# Altium PCB 功率主板.PcbDoc
Units mil, origin at the board's own origin, x right, y up, seen from the top; angles counter-clockwise.
Board outline 9524.95 x 5345.03 mil, 2 copper layers (Top Layer, Bottom Layer); 43 components, 30 nets, 130 pads, 0 vias.
Unrouted connection lines stored in the file: 16.
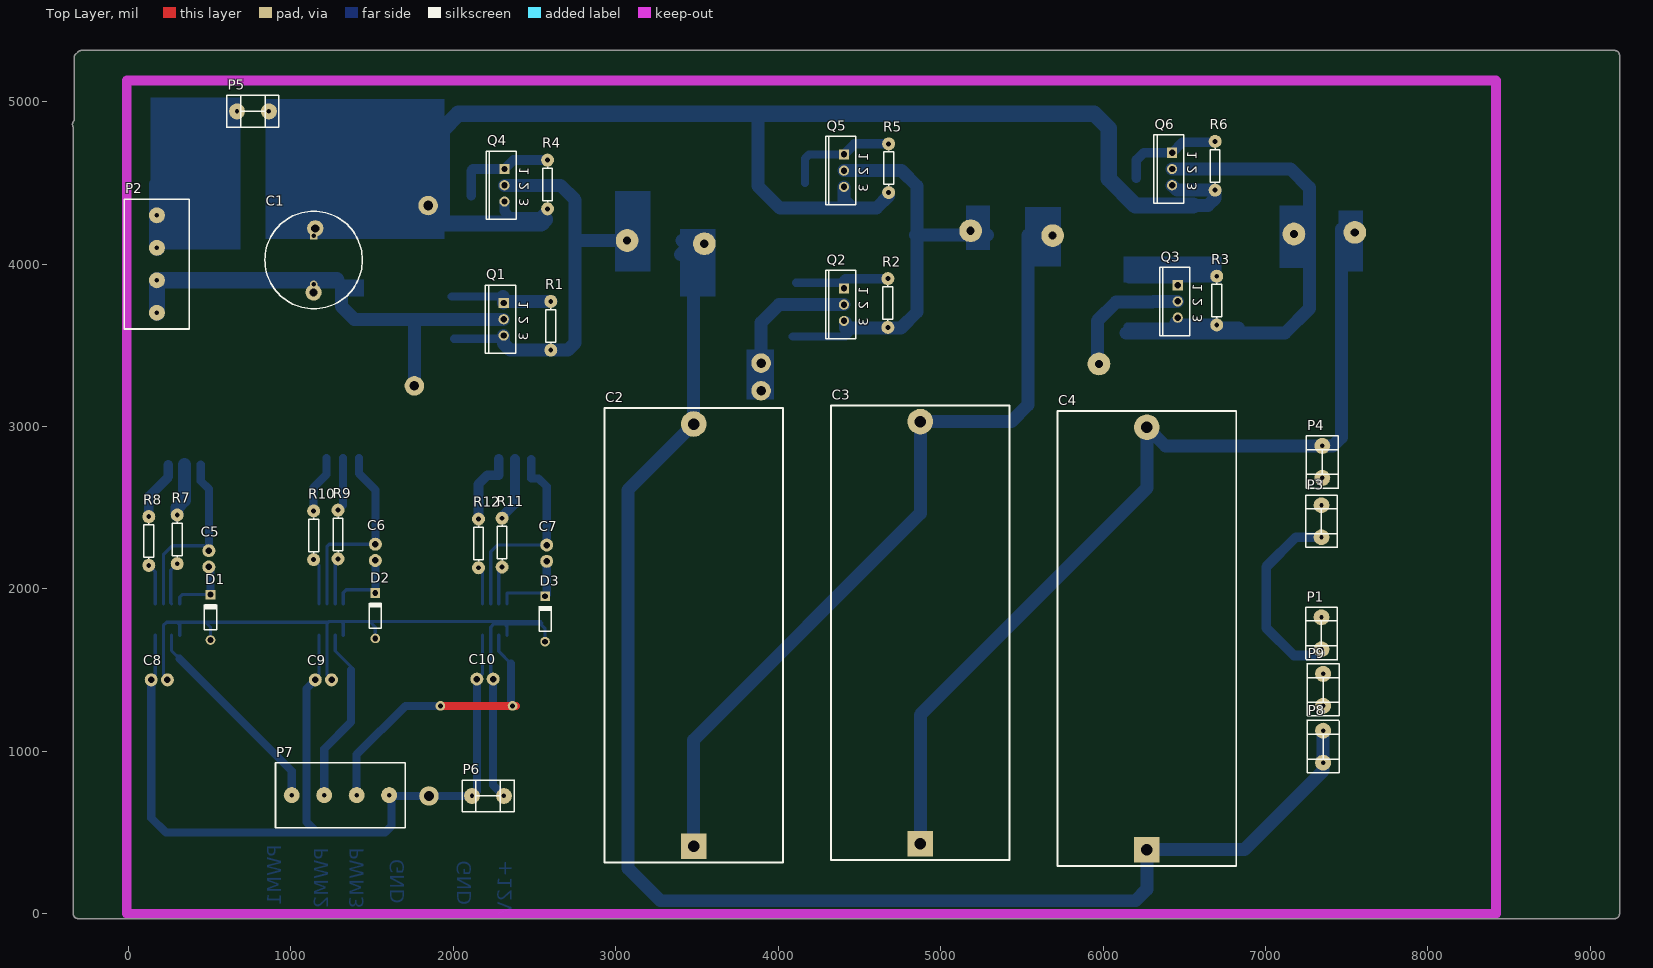
[diagram p0: Top Layer view]
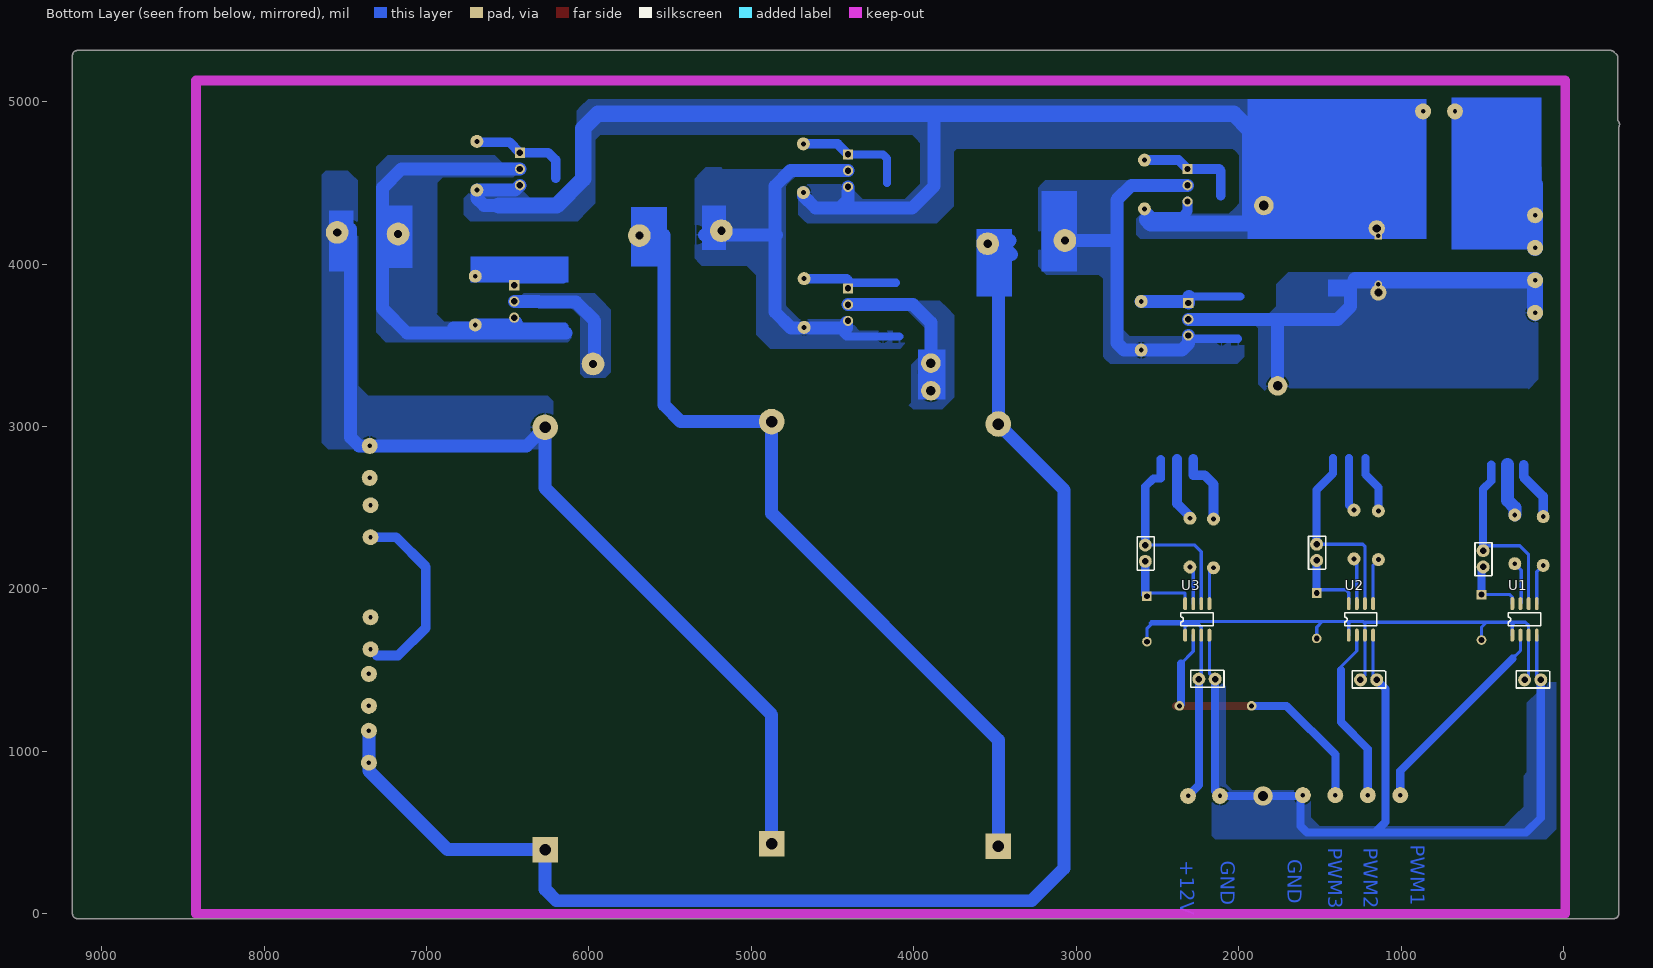
[diagram p1: Bottom Layer view, seen from below]

## Layer stack, top to bottom
Top Solder: solder mask 0.4, Solder Resist, Dk 3.5
Top Layer: signal copper 1.4
Dielectric 1: dielectric 12.6, FR-4, Dk 4.8
Bottom Layer: signal copper 1.4
Bottom Solder: solder mask 0.4, Solder Resist, Dk 3.5

## Board outline
-340.01,0 -340.01,4843.41 cw(c-315,4860) -336.22,4881.22 -335.01,4882.43 -335.01,5270 cw(c-305,5270) -326.2,5291.24 -326.22,5291.22 -311.22,5306.22 -311.24,5306.2 cw(c-290,5285) -290,5315.02 9150,5315.02 cw(c9150,5285) 9180.01,5285 9180.01,0 cw(c9150,0) 9150,-30.02 -310,-30.02 cw(c-310,0)

## Design rules (kind name [scope] priority, off if disabled: settings)
Clearance [All] p1: gap=10
PolygonConnect [All] p1: connectstyle=Relief reliefconductorwidth=10 reliefentries=4 polygonreliefangle="90 Angle" airgapwidth=10
RoutingVias [All] p1: holewidth=28 width=50 viastyle="Through Hole" minholewidth=28 minwidth=50 maxholewidth=28 maxwidth=50
SolderMaskExpansion [All] p1: expansion=4
Width [All] p1: maxlimit=100 minlimit=10 preferedwidth=10
30 further rules are at their usual default settings.

## Components (designator, comment, footprint, x,y, rotation, side; value= is the part's Value field where it differs from the comment)
C1 "CAP" RB7.6-15 1140,4025 r90 top
C2 "20uf" 20uF400V 3480,415 r90 top
C3 "20" 20uF400V 4875,430 r90 top
C4 "CAP" 20uF400V 6270,395 r90 top
C5 "Cap Semi" 接口2 495,2160 r270 top
C6 "Cap Semi" 接口2 1520,2200 r270 top
C7 "Cap Semi" 接口2 2575,2195 r270 top
C8 "Cap Pol1" 接口2 165,1440 r180 top
C9 "Cap Pol1" 接口2 1175,1440 r180 top
C10 "Cap Pol1" 接口2 2170,1445 r180 top
D1 "IN5819" DIO7.1-3.9x1.9 505,1825 r90 top
D2 "IN5819" DIO7.1-3.9x1.9 1520,1835 r90 top
D3 "IN5819" DIO7.1-3.9x1.9 2565,1815 r90 top
P1 "Header 2" tie-in 7345,1825 r270 top
P2 "Header 4" BIG_HEAD4 175,4300 r270 top
P3 "Header 2" tie-in 7345,2515 r270 top
P4 "Header 2" tie-in 7350,2880 r270 top
P5 "Header 2" tie-in 865,4940 r180 top
P6 "Header 2" tie-in 2115,725 r0 top
P7 "Header 4" BIG_HEAD4 1605,730 r180 top
P8 "Header 2" tie-in 7355,930 r90 top
P9 "Header 2" tie-in 7355,1280 r90 top
Q1 "640N" SFM-T3/A4.7V 2310,3660 r270 top
Q2 "640N" SFM-T3/A4.7V 4405,3750 r270 top
Q3 "640N" SFM-T3/A4.7V 6460,3770 r270 top
Q4 "640N" SFM-T3/A4.7V 2315,4485 r270 top
Q5 "640N" SFM-T3/A4.7V 4405,4575 r270 top
Q6 "640N" SFM-T3/A4.7V 6425,4585 r270 top
R1 "10K" RES 2600,3470 r0 top
R2 "10K" RES 4675,3610 r0 top
R3 "10K" RES 6700,3625 r0 top
R4 "10K" RES 2580,4340 r0 top
R5 "10K" RES 4680,4440 r0 top
R6 "10K" RES 6690,4455 r0 top
R7 "Res2" RES 300,2155 r0 top
R8 "Res2" RES 125,2145 r0 top
R9 "Res2" RES 1290,2185 r0 top
R10 "Res2" RES 1140,2180 r0 top
R11 "Res2" RES 2300,2135 r0 top
R12 "Res2" RES 2155,2130 r0 top
U1 "IR2104S" IR2104S 315,1715 r90 bottom
U2 "IR2104S" IR2104S 1322.5,1715 r90 bottom
U3 "IR2104S" IR2104S 2330,1715 r90 bottom

## Footprints (in the part's own frame and the unit in brackets; to place one, negate y for a bottom-side part, rotate by r counter-clockwise, add the part's x,y. Pads: shape width x height; smd on the part's side, far side on the other; paste and mask are expansions set on the pad)
20uF400V [mm]
  rect 4x4 hole 1.8: 1(0,0)
  round 4 hole 1.8: 2(66.04,0)
  silkscreen extent -2.54,-13.97 68.58,13.97
BIG_HEAD4 [mm]
  round 2.5 hole 0.7: 1(0,0) 2(5.08,0) 3(10.16,0) 4(15.24,0)
  silkscreen extent -2.54,-5.08 17.78,5.08
DIO7.1-3.9x1.9 [mm]
  round 1.5 hole 0.9: 1(-3.55,0)
  rect 1.5x1.5 hole 0.9: 2(3.55,0)
  silkscreen extent -1.95,-0.95 2.05,0.95
IR2104S [mil]
  oval 80x23.62 smd: 1(0,0) 2(0,-50) 3(0,-100) 4(0,-150) 5(194,-150) 6(194,-100) 7(194,-50) 8(194,0)
  silkscreen extent 57,-173 137,25
RB7.6-15 [mm] "Polarized Capacitor (Radial); 2 Leads"
  rect 1.2x1.2 hole 0.7: 1(3.81,0)
  round 1.2 hole 0.7: 2(-3.81,0)
  silkscreen extent -7.62,-7.62 7.62,7.62
RES [mil]
  round 80 hole 30: 1(0,0) 2(0,300)
  silkscreen extent -30,41 30,259
SFM-T3/A4.7V [mm]
  rect 1.6x1.6 hole 1: 1(-2.54,0)
  round 1.6 hole 1: 2(0,0) 3(2.54,0)
  silkscreen extent -5.35,-2.85 5.35,1.85
tie-in [mm]
  round 2.5 hole 0.7: 1(0,0) 2(5,0)
  silkscreen extent -1.56,-2.5 6.6,2.54
接口2 [mil]
  round 80 hole 40: 1(-75,0) 2(25,0)

## Part data
C2 C3: library part CAP
C5 C6 C7: "Capacitor (Semiconductor SIM Model)"
C8 C9 C10: "Polarized Capacitor (Radial)"
D1 D2 D3: library part Diode, "Default Diode"
P1 P3 P4 P5 P6 P8 P9: "Header, 2-Pin"
P2 P7: "Header, 4-Pin"
Q1 Q2 Q3 Q4 Q5 Q6: library part NMOS-2, "N-Channel Power MOSFET"
R1 R2 R3 R4 R5 R6: library part res
R7 R8 R9 R10 R11 R12: "Resistor"
U1 U2 U3: library part Component_1_1

## Free pads (board coordinates)
  round 100 hole 50: 0(1140,3825) 1(1150,4220)
  round 60 hole 30: 0(1920,1280) 1(2365,1280)
  round 120 hole 60: 2(1760,3250) 3(3895,3220) 4(3895,3390) 6(1845,4360) 7(1850,725)
  round 140 hole 50: 2(5975,3385) 3(3070,4145) 4(3545,4125) 5(5185,4205) 6(5690,4175) 7(7175,4185) 8(7550,4195)

## Nets (pads, with @x,y where several pads share a name; then routed paths per layer and width w, separated by ;. In a path a pad name is that pad's centre, name@x,y a point inside that pad or via, vN(x,y) a via of type N, cw(c..) or ccw(c..) an arc to the next point about the centre after c; other vN are vias at no path point)
12V: C8.1 C9.1 C10.1 D1.1 D2.1 D3.1 P6.2 U1.1 U1.3 U2.1 U2.3 U3.1 U3.3 | length 5038
  Bottom Layer w20: C8.1 215,1465 U1.3 215,1775 235,1795 300,1795 ; U1.1 315,1780 300,1795 ; D1.1 505,1765 475,1795 ; C9.1 1222.5,1467.5 U2.3 1222.5,1787.5 1230,1795 ; U2.1 1322.5,1787.5 1310,1800 ; D2.1 1520,1765 1485,1800 ; C10.1@2230,1460 U3.3 2230,1765 2250,1785 2315,1785 ; U3.1 2330,1770 2315,1785 ; 2535,1785 2315,1785 ; 2537.5,1782.5 2565,1755 D3.1 ; 2545,1790 2535,1800 1485,1800 ; 300,1795 475,1795 ; 475,1795 1230,1795 ; 1230,1795 1235,1800 1310,1800 ; 1310,1800 1485,1800
  Bottom Layer w50: C10.1 2245,791.85 P6.2
GND: C1.1 C8.2 C9.2 C10.2 P5.1 P6.1 P7.1 pad.1@1150,4220 pad.6@1845,4360 pad.7@1850,725 Q4.3 Q5.3 Q6.3 R4.1 R5.1 R6.1 U1.4 U2.4 U3.4 | length 15878.4
  Bottom Layer w20: C8.2 165,1465 U1.4 ; C9.2 1172.5,1462.5 U2.4 ; C10.2 2180,1480 U3.4
  Bottom Layer w50: C8.2 140,590 230,500 1160,500 ; C9.2 1095,1385 1095,565 1160,500 ; P7.1 P7.1@1610,725 ; P6.1 P7.1@1610,725 ; P6.1@2145,755 C10.2 ; 1160,500 1580,500 1620,540 1620,715 P7.1@1610,725
  Bottom Layer w60: Q4.3 2315,4325 2350,4290 2530,4290 R4.1
  Bottom Layer w80: 3875,4925 3875,4480 4010,4345 4455,4345 ; Q5.3 4405,4395 4455,4345 ; R5.1 4680,4420 4605,4345 4455,4345 ; 6300,4360 6645,4360 6690,4405 R6.1 6455,4455 Q6.3
  Bottom Layer w100: 945,4665 1260,4665 1340,4585 1340,4250 1930,4250 ; 2565,4275 2540,4250 1930,4250 ; 6555,4360 6200,4360 6035,4525 6035,4835 5945,4925 3875,4925 2030,4925 1930,4825 1930,4250
MOTO1: P7.4 U1.2 | length 1291.5
  Bottom Layer w20: U1.2 265,1620 315,1570
  Bottom Layer w50: 315,1570 1005,880 P7.4
MOTO2: P7.3 U2.2 | length 1093.7
  Bottom Layer w20: U2.2 1272.5,1617.5 1370,1520 1370,1500
  Bottom Layer w50: P7.3 1205,1015 1370,1180 1370,1500
MOTO3: P7.2 pad.0@1920,1280 pad.1@2365,1280 U3.2 | length 1829.5
  Top Layer w50: pad.0@1920,1280 2365,1280 pad.1@2385,1280
  Bottom Layer w20: U3.2 2280,1615 2355,1540
  Bottom Layer w50: P7.2 1405,980 1705,1280 1920,1280 pad.0@1925,1280 ; 2355,1540 2355,1290 pad.1@2365,1280
N-OUT: P1.2 P3.2 P4.2 | length 1163.9
  Bottom Layer w60: 7306.85,1590 7175,1590 7005,1760 7005,2136.3 7186.85,2318.15 P3.2
Net*1_1: C5.1 pad.3@3070,4145 Q1.3 Q4.2 R1.1 U1.6 | length 3777.7
  Bottom Layer w20: U1.6 215,2210 270,2265 465,2265 C5.1
  Bottom Layer w50: 445,2765 445,2665 495,2615 C5.1 ; 2005,3540 2105,3540 2290,3540 Q1.3
  Bottom Layer w80: Q1.3 2310,3510 2350,3470 R1.1 2705,3470 2750,3515 2750,4395 2660,4485 Q4.2 ; 2755,4145 3175,4145
Net*2_1: C6.1 pad.5 Q2.3 Q5.2 R2.1 U2.6 | length 3849.1
  Bottom Layer w20: U2.6 1222.5,2262.5 1235,2275 C6.1
  Bottom Layer w50: 1420,2805 1420,2710 1520,2610 C6.1 ; 4090,3555 4190,3555 4415,3555 4465,3605
  Bottom Layer w80: Q5.2 4760,4575 4855,4480 4855,3705 4755,3605 4465,3605 4415,3605 Q2.3@4415,3640 ; 4845,4180 5290,4180
Net*3_1: C7.1 pad.7@7175,4185 Q3.3 Q6.2 R3.1 U3.6 | length 4872.5
  Bottom Layer w20: U3.6 2230,2230 2270,2270 C7.1
  Bottom Layer w50: 2480,2800 2480,2700 2480,2680 2525,2680 2575,2630 C7.1 ; 6150,3615 6250,3615 6515,3615
  Bottom Layer w80: 6140,3575 7120,3575 7270,3725 7270,4215 7270,4470 7155,4585 Q6.2 ; 6450,3640 6465,3625 R3.1 6720,3605 6835,3605
NetC5_2: C5.2 D1.2 U1.8 | length 411.5
  Bottom Layer w20: U1.8 315,1950 329.76,1964.76 D1.2
  Bottom Layer w50: C5.2 505,2125 D1.2
NetC6_2: C6.2 D2.2 U2.8 | length 481.9
  Bottom Layer w20: U2.8 1322.5,1977.5 1340,1995 1499.76,1995 D2.2
  Bottom Layer w50: D2.2 C6.2
NetC7_2: C7.2 D3.2 U3.8 | length 511.7
  Bottom Layer w20: U3.8 2330,1970 2335,1975 2544.76,1975 D3.2
  Bottom Layer w50: D3.2@2575,1964.76 C7.2
NetP2_1: P2.1 P2.2 P5.2 | length 867.5
  Bottom Layer w100: P2.2 P2.1 175,4490 350,4665 580,4665
NetQ1_1: Q1.1 R1.2 R7.2 | length 979.9
  Bottom Layer w50: 1990,3800 2090,3800 2305,3800
  Bottom Layer w80: R7.2 300,2500 345,2545 345,2665 345,2765 ; 2305,3800 2310,3795 Q1.1 2320,3770 R1.2
NetQ2_1: Q2.1 R2.2 R9.2 | length 907.8
  Bottom Layer w50: R9.2 1320,2515 1320,2705 1320,2805 ; 4110,3885 4210,3885 4390,3885 4405,3900
  Bottom Layer w60: 4405,3900 4415,3910 R2.2
NetQ3_1: Q3.1 R3.2 R11.2 | length 965.2
  Bottom Layer w60: R11.2 2300,2445 2380,2525 2380,2700 2380,2800 ; 6160,3910 6260,3910 6460,3910 ; 6475,3910 6460,3910 ; R3.2 6465,3925 6460,3920 6460,3910
NetQ4_1: Q4.1 R4.2 R8.2 | length 1021.6
  Bottom Layer w60: R8.2 125,2570 245,2690 245,2765 ; 2110,4420 2110,4520 2110,4575 2120,4585 Q4.1 2370,4640 R4.2
NetQ5_1: Q5.1 R5.2 R10.2 | length 1060.4
  Bottom Layer w50: R10.2 1140,2625 1220,2705 1220,2805 ; 4165,4500 4165,4600 4165,4650 4190,4675 Q5.1
  Bottom Layer w60: Q5.1 4470,4740 R5.2
NetQ6_1: Q6.1 R6.2 R12.2 | length 1098.3
  Bottom Layer w60: R12.2 2155,2645 2210,2700 2280,2700 2280,2800 ; 6205,4530 6205,4630 6205,4640 6250,4685 Q6.1 6490,4750 R6.2@6685,4750
NetR7_1: R7.1 U1.7 | length 264.6
  Bottom Layer w20: U1.7 260,1914 260,2115 R7.1
NetR8_1: R8.1 U1.5 | length 252.6
  Bottom Layer w20: R8.1 165,2105 U1.5
NetR9_1: R9.1 U2.7 | length 283.2
  Bottom Layer w20: U2.7 1272.5,2167.5 R9.1
NetR10_1: R10.1 U2.5 | length 238.5
  Bottom Layer w20: U2.5 1172.5,2147.5
NetR11_1: R11.1 U3.7 | length 206
  Bottom Layer w20: U3.7 R11.1@2280,2115
NetR12_1: R12.1 U3.5 | length 196
  Bottom Layer w20: U3.5 R12.1@2180,2105
U-OUT: C2.2 C4.1 P8.1 P8.2 pad.4@3545,4125 | length 9217.9
  Bottom Layer w80: 3400,4060 3436.85,4096.85 3436.85,4115 ; 3406.85,4145 3436.85,4115 ; P8.2 P8.1 7355,880 6870,395 C4.1 6270,150 6200,80 3275,80 3075,280 3075,2610 C2.2 3480,4071.85 3436.85,4115
UC-OUT: P1.1 P9.1 P9.2
V-OUT: C2.1 C3.2 P3.1 pad.6@5690,4175 | length 4952.1
  Bottom Layer w80: C2.1 3480,1070 4875,2465 C3.2 5435,3030 5536.85,3131.85 5536.85,4180 ; P3.1@7340,2520 P3.1
VCC: C1.2 P2.3 P2.4 pad.0@1140,3825 pad.2 pad.3@3895,3220 pad.4@3895,3390 Q1.2 Q2.2 Q3.2 | length 4568.4
  Bottom Layer w80: 1310,3840 1310,3740 1390,3660 Q1.2 ; pad.2@1760,3265 1760,3660 ; pad.3@3895,3255 3895,3640 4005,3750 Q2.2 ; pad.2@5965,3400 5965,3650 6080,3765 6305,3765 6310,3770 Q3.2
  Bottom Layer w100: P2.4 P2.3 1280,3900
W-OUT: C3.1 C4.2 P4.1 pad.8 | length 5691.9
  Bottom Layer w80: C3.1 4875,1225 6270,2620 C4.2 6385,2880 P4.1 7415,2880 7466.85,2931.85 7466.85,4215

## Polygon pours and split planes (outlines as drawn)
VCC on Bottom Layer "Bottom Layer-No Net" (solid, remove dead copper, pour order 2): 165,3920 155,3910 155,3345 155,3290 215,3230 220,3235 540,3235 1825,3235 1840,3220 1880,3260 1880,3495 1880,3605 1885,3610 1900,3625 2270,3625 2320,3675 2305,3690 2070,3690 1820,3690 1810,3700 1770,3740 1770,3840 1770,3875 1730,3915 1695,3950 1570,3950 1185,3950 1170,3935 165,3935 165,3740 150,3725
NetP2_1 on Bottom Layer "Bottom Layer-No Net" (solid, remove dead copper, pour order 4): 165,4085 175,4095 580,4095 580,4525 660,4605 665,4610 665,4710 250,4710 210,4670 135,4595 135,4270 135,4155 195,4095
VCC on Bottom Layer "Bottom Layer-No Net" (solid, remove dead copper, pour order 12): 4410,3775 3840,3775 3795,3730 3750,3685 3750,3525 3750,3180 3770,3160 3825,3105 3920,3105 4005,3105 4030,3130 4015,3145 4015,3280 4015,3380 3975,3420 3930,3465 3930,3580 3930,3605 3990,3665 4045,3720 4375,3720 4405,3750
GND on Bottom Layer "Bottom Layer-No Net" (solid, remove dead copper, pour order 30): 120,1440 105,1425 45,1425 45,520 90,475 105,460 255,460 2145,460 2155,470 2165,480 2165,600 2165,725 2155,735 2155,1425 2105,1425 2080,1400 2080,1295 2080,800 2055,775 2040,760 1630,760 1600,760 1565,725 1555,715 1555,605 1555,595 1515,555 1500,540 1260,540 365,540 300,605 245,660 245,665 245,850 225,870 225,1155 225,1300 160,1365 140,1385 140,1415
GND on Bottom Layer "Bottom Layer-No Net 1" (solid, remove dead copper, pour order 17): 1915,4995 1935,5015 5955,5015 6005,5015 6050,4970 6075,4945 6075,4560 6075,4520 6155,4440 6195,4400 6350,4400 6355,4400 6415,4460 6430,4475 6620,4475 6700,4475 6750,4425 6770,4405 6770,4335 6770,4305 6730,4265 6115,4265 6070,4265 6005,4330 5960,4375 5960,4740 5960,4765 5935,4790 5930,4795 5640,4795 4010,4795 3985,4770 3960,4745 3960,4640 3960,4495 4010,4445 4055,4400 4215,4400 4315,4400 4340,4425 4405,4490 4415,4490 4660,4490 4700,4450 4710,4440 4710,4325 4710,4305 4670,4265 4655,4250 4445,4250 3860,4250 3785,4325 3755,4355 3755,4580 3755,4690 3740,4705 3735,4710 3665,4710 2035,4710 2015,4690 1995,4670 1995,4490 1995,4375 2025,4345 2060,4310 2185,4310 2600,4310 2610,4300 2630,4280 2630,4205 2630,4180 2615,4165 2605,4155 1945,4155 1380,4155 1260,4275 1490,4505 1490,4995
Net*1_1 on Bottom Layer "Bottom Layer-No Net 1" (solid, remove dead copper, pour order 19): 2310,4515 3190,4515 3215,4490 3235,4470 3235,4115 3235,3985 3200,3950 3185,3935 2970,3935 2860,3935 2850,3925 2835,3910 2835,3665 2835,3430 2820,3415 2790,3385 2670,3385 2010,3385 1980,3415 1965,3430 1965,3555 2670,3555 2695,3580 2710,3595 2710,3950 2710,4390 2685,4415 2640,4460 2390,4460 2320,4460 2300,4480
Net*2_1 on Bottom Layer "Bottom Layer-No Net 1" (solid, remove dead copper, pour order 23): 4390,4585 5175,4585 5185,4595 5255,4595 5280,4595 5320,4555 5350,4525 5350,4135 5350,4035 5320,4005 5305,3990 5070,3990 5030,3990 4985,3945 4970,3930 4970,3755 4970,3565 4920,3515 4885,3480 4105,3480 4085,3480 4045,3520 4045,3590 4335,3590 4370,3625 4405,3660 4630,3660 4705,3660 4780,3735 4790,3745 4790,3970 4790,4480 4775,4495 4725,4545 4610,4545 4395,4545 4390,4550
W-OUT on Bottom Layer "Bottom Layer-No Net 1" (solid, remove dead copper, pour order 27): 7425,4240 7425,4515 7460,4550 7485,4575 7610,4575 7620,4575 7635,4560 7645,4550 7645,4290 7645,2900 7620,2875 7605,2860 7390,2860 6285,2860 6210,2935 6220,2945 6220,3150 6220,3155 6255,3190 6855,3190 7360,3190 7415,3245 7420,3250 7420,3735 7420,4195 7440,4215
Net*3_1 on Bottom Layer "Bottom Layer-No Net 1" (solid, remove dead copper, pour order 29): 6445,4600 6470,4625 6510,4625 6535,4625 6575,4665 6580,4670 6745,4670 7240,4670 7265,4645 7310,4600 7310,4465 7310,3580 7250,3520 7060,3520 6130,3520 6105,3545 6110,3550 6110,3630 6395,3630 6430,3665 6450,3645 6770,3645 6890,3645 6940,3695 6935,3700 6935,3880 6935,4500 6920,4515 6900,4535 6715,4535 6465,4535 6440,4560
VCC on Bottom Layer "Bottom Layer-No Net 1" (solid, remove dead copper, pour order 31): 6450,3790 6430,3790 6415,3805 6400,3820 6245,3820 5965,3820 5925,3780 5865,3720 5865,3520 5865,3335 5890,3310 5900,3300 5965,3300 6030,3300 6040,3310 6055,3325 6055,3440 6055,3675 6085,3705 6115,3735 6390,3735 6440,3735 6460,3755

## Keep-outs
Keep-Out Layer:
  lines w60: -10,0 -10,4575 -10,5130 8420,5130 8420,0 -10,0

## Other copper
Bottom Layer:
  rectangle net NetQ3_1: 6125,3885 6730,4045
  rectangle net VCC: 3805,3165 3975,3475
  rectangle net VCC: 1285,3800 1450,3905
  rectangle net GND: 845,4155 1945,5015
  rectangle net NetP2_1: 135,4090 690,5025
  rectangle net V-OUT: 5520,3985 5740,4350
  rectangle net Net*3_1: 7085,3975 7265,4360
  rectangle net W-OUT: 7450,3955 7600,4330
  rectangle net Net*2_1: 5155,4085 5305,4360
  rectangle net U-OUT: 3395,3800 3615,4215
  rectangle net Net*1_1: 2995,3955 3215,4450
  text "PWM1" at 970,425 h150 r90
  text "PWM2" at 1260,405 h150 r90
  text "PWM3" at 1480,405 h150 r90
  text "GND" at 1730,335 h150 r90
  text "+12V" at 2390,330 h150 r90
  text "GND" at 2140,325 h150 r90

## Text inside footprints (layer, text, board x,y; h text height)
Q1: Top Overlay "2" at 2460.59,3679.69 h59.06 r90; Top Overlay "1" at 2460.59,3769.84 h59.06 r90; Top Overlay "3" at 2460.59,3579.69 h59.06 r90
Q2: Top Overlay "2" at 4555.59,3769.69 h59.06 r90; Top Overlay "1" at 4555.59,3859.84 h59.06 r90; Top Overlay "3" at 4555.59,3669.69 h59.06 r90
Q3: Top Overlay "2" at 6610.59,3789.69 h59.06 r90; Top Overlay "1" at 6610.59,3879.84 h59.06 r90; Top Overlay "3" at 6610.59,3689.69 h59.06 r90
Q4: Top Overlay "2" at 2465.59,4504.69 h59.06 r90; Top Overlay "1" at 2465.59,4594.84 h59.06 r90; Top Overlay "3" at 2465.59,4404.69 h59.06 r90
Q5: Top Overlay "2" at 4555.59,4594.69 h59.06 r90; Top Overlay "1" at 4555.59,4684.84 h59.06 r90; Top Overlay "3" at 4555.59,4494.69 h59.06 r90
Q6: Top Overlay "2" at 6575.59,4604.69 h59.06 r90; Top Overlay "1" at 6575.59,4694.84 h59.06 r90; Top Overlay "3" at 6575.59,4504.69 h59.06 r90